# Altium PCB Luciferin_Module_V2.0_final.pcbdoc
Units mil, origin at the board's own origin, x right, y up, seen from the top; angles counter-clockwise.
Board outline 2185 x 2500 mil, 2 copper layers (Top Layer, Bottom Layer); 25 components, 44 nets, 58 pads, 34 vias.
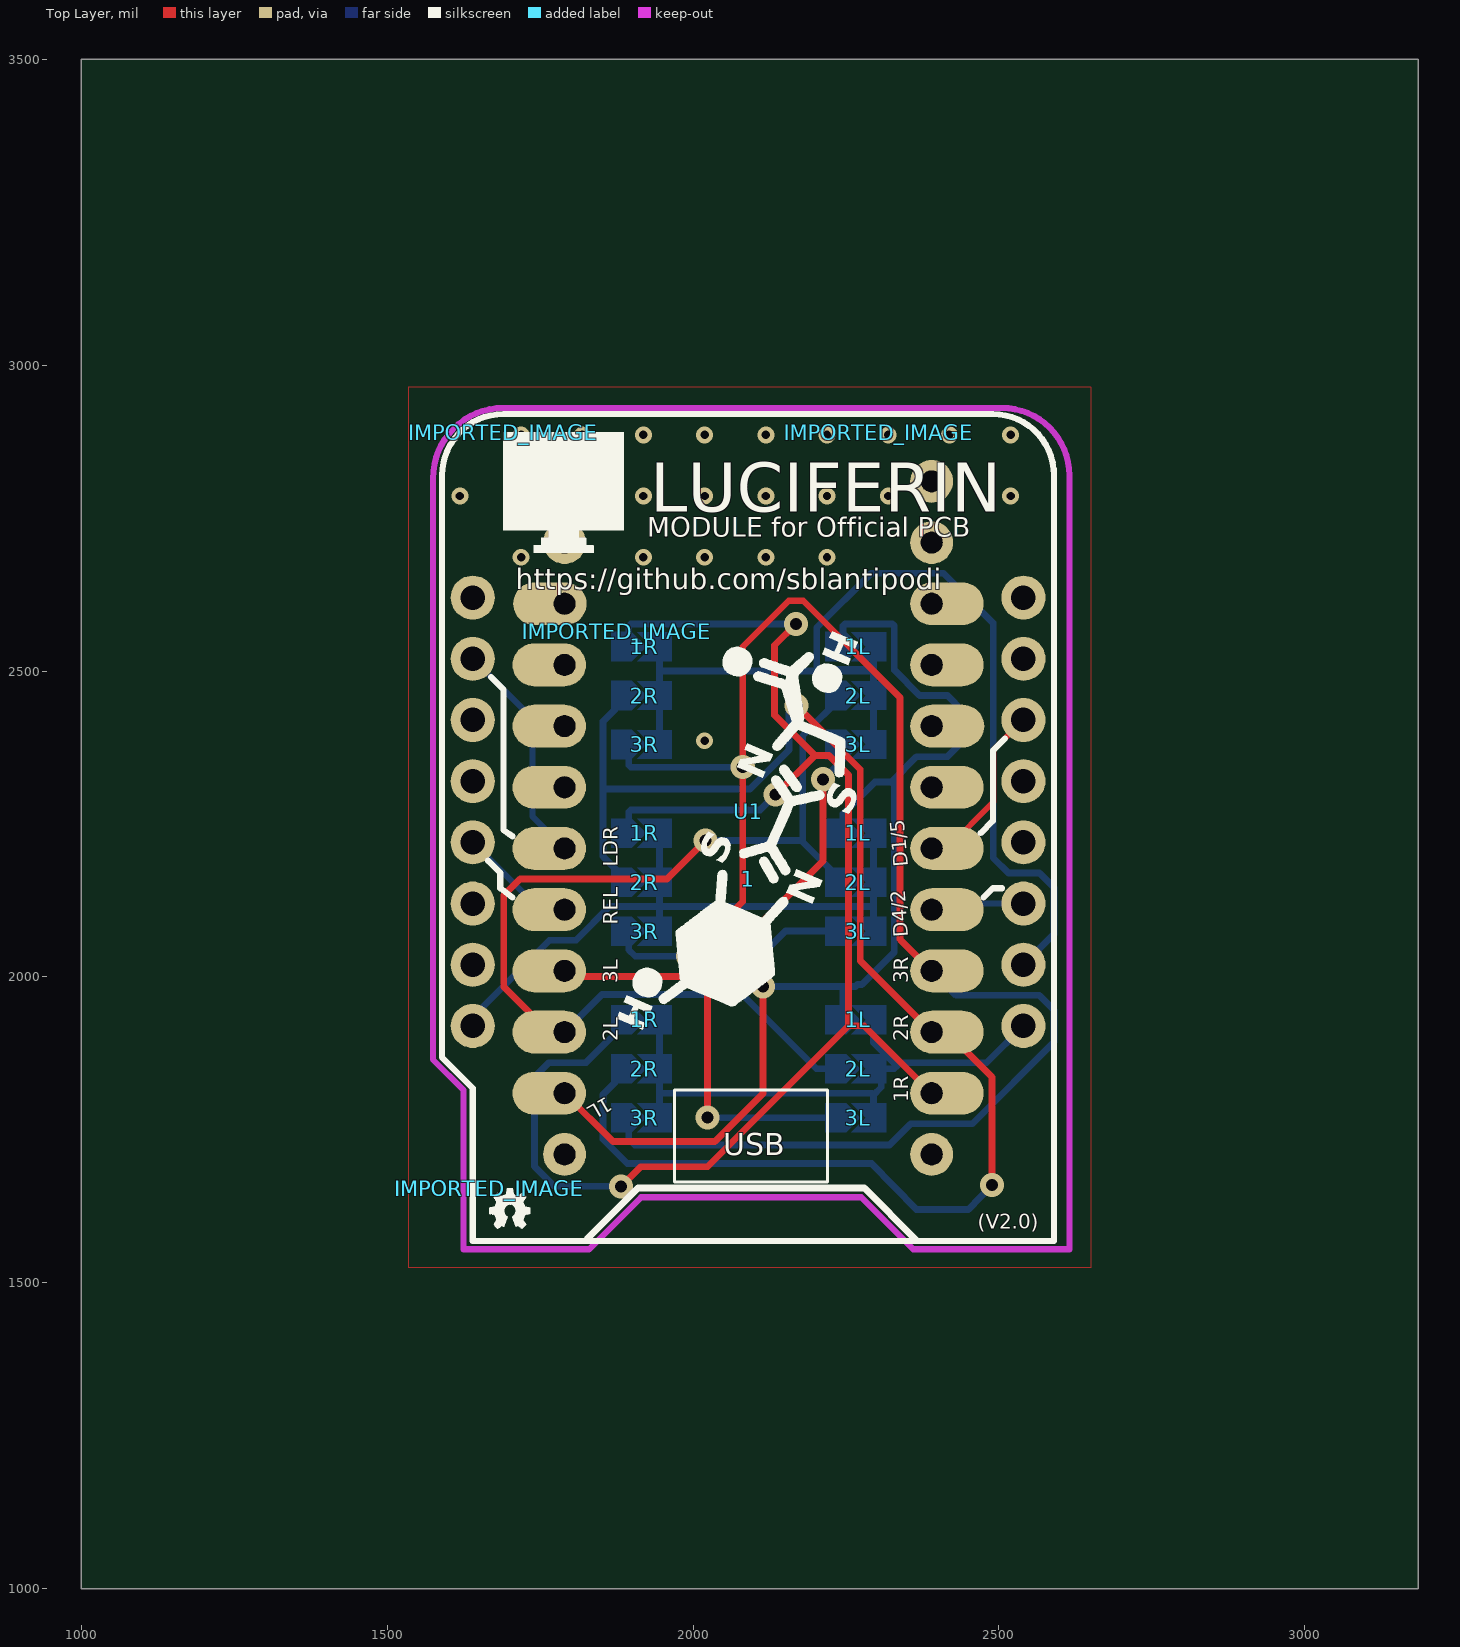
[diagram p0: Top Layer view]
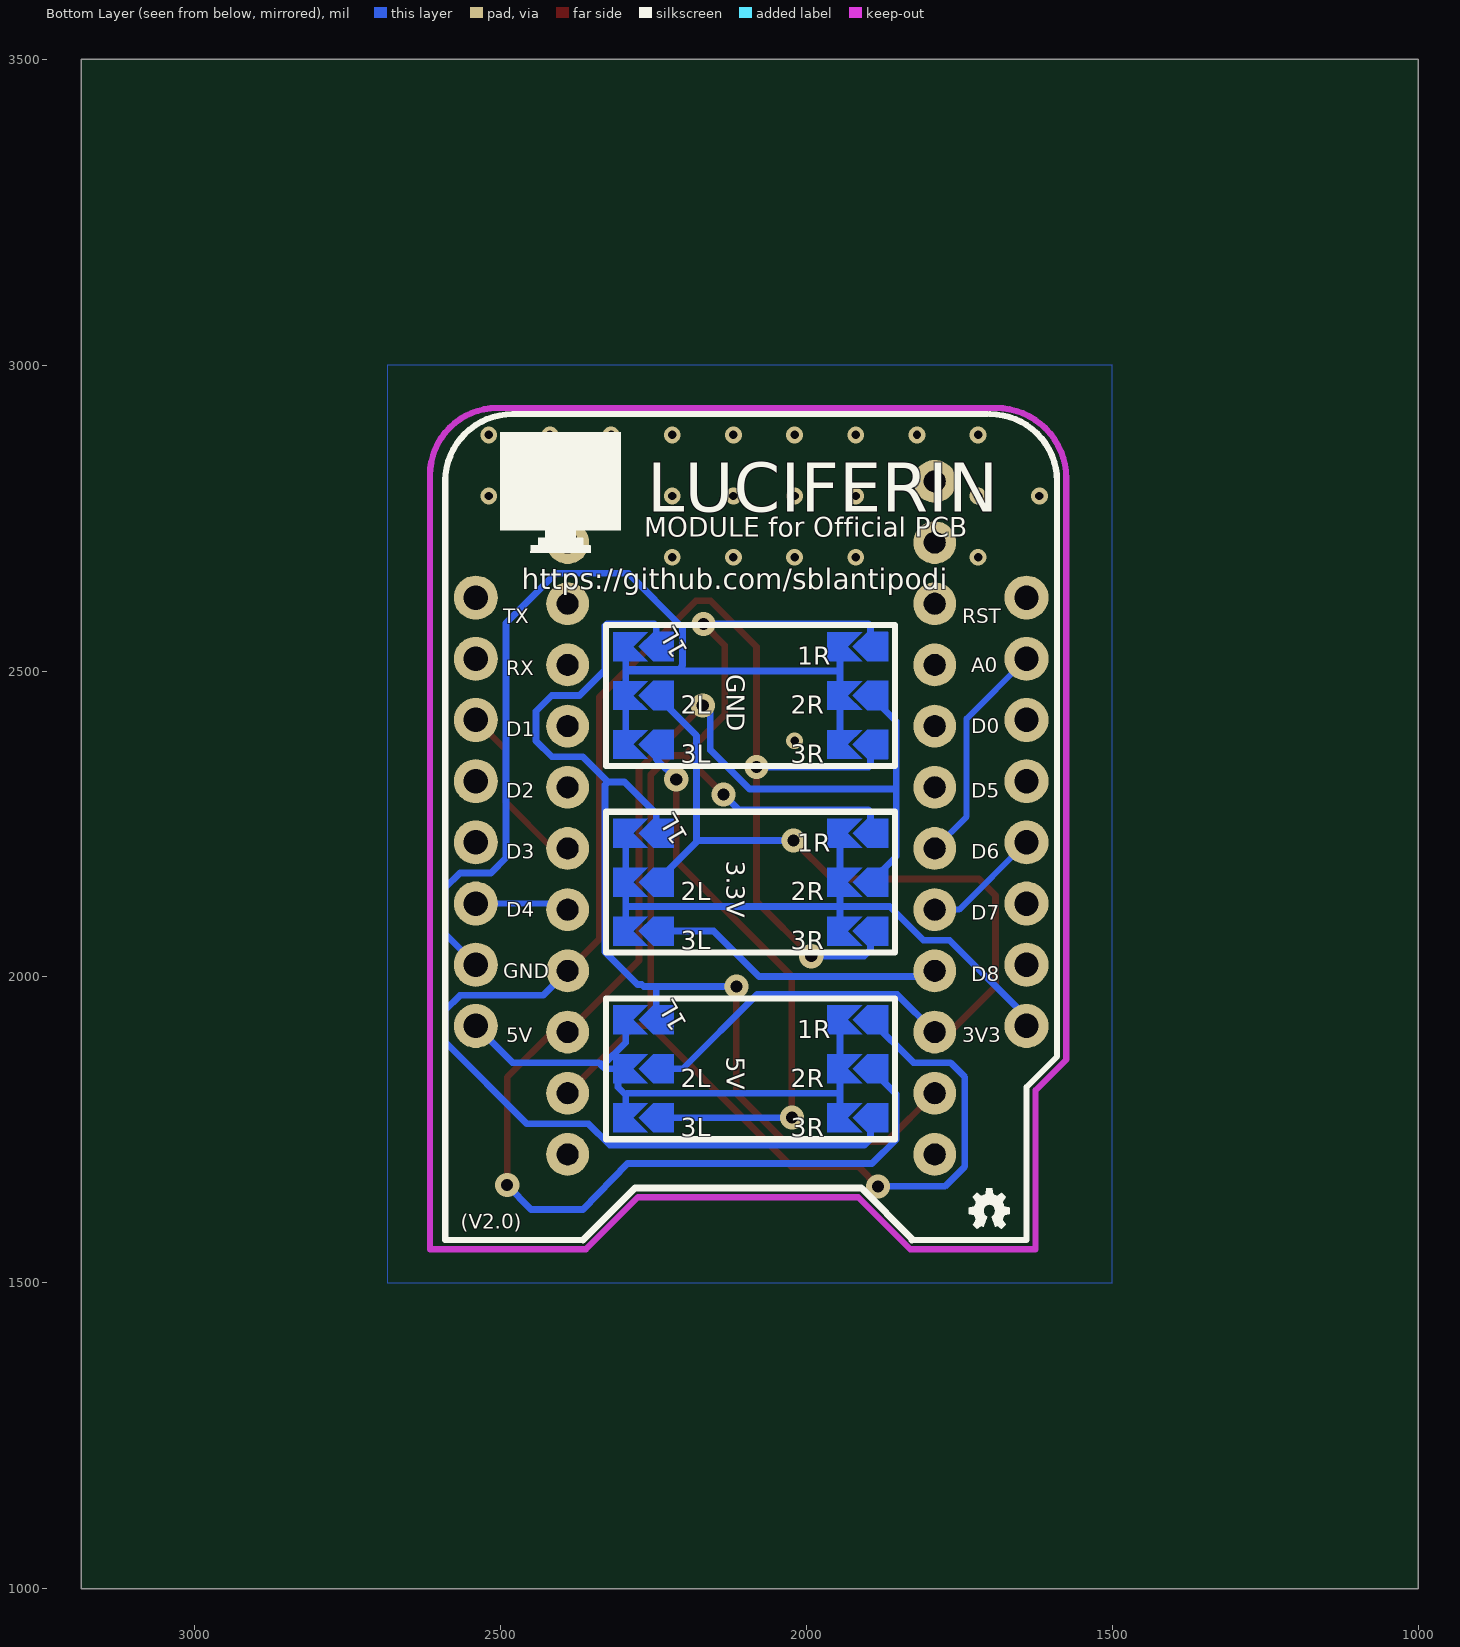
[diagram p1: Bottom Layer view, seen from below]

## Layer stack, top to bottom
Top Layer: signal copper (thickness not stored)
Dielectric: dielectric 12.6, FR-4, Dk 4.8
Bottom Layer: signal copper (thickness not stored)

## Board outline
3185,1000 1000,1000 1000,3500 3185,3500

## Components (designator, comment, footprint, x,y, rotation, side; value= is the part's Value field where it differs from the comment)
1 "SBLANT_TINYPICO_V3" TINYPICOV3 2090,2235 r90 top
1L "Solder_joint" SB_SOLDER_JOINT 2270,2235 r0 top
1L "Solder_joint" SB_SOLDER_JOINT 2270,1930 r0 top
1L "Solder_joint" SB_SOLDER_JOINT 2270,2540 r0 top
1R "Solder_joint" SB_SOLDER_JOINT 1920,2235 r0 top
1R "Solder_joint" SB_SOLDER_JOINT 1920,1930 r0 top
1R "Solder_joint" SB_SOLDER_JOINT 1920,2540 r0 top
2L "Solder_joint" SB_SOLDER_JOINT 2270,2155 r0 top
2L "Solder_joint" SB_SOLDER_JOINT 2270,1850 r0 top
2L "Solder_joint" SB_SOLDER_JOINT 2270,2460 r0 top
2R "Solder_joint" SB_SOLDER_JOINT 1920,2155 r0 top
2R "Solder_joint" SB_SOLDER_JOINT 1920,1850 r0 top
2R "Solder_joint" SB_SOLDER_JOINT 1920,2460 r0 top
3L "Solder_joint" SB_SOLDER_JOINT 2270,2075 r0 top
3L "Solder_joint" SB_SOLDER_JOINT 2270,1770 r0 top
3L "Solder_joint" SB_SOLDER_JOINT 2270,2380 r0 top
3R "Solder_joint" SB_SOLDER_JOINT 1920,2075 r0 top
3R "Solder_joint" SB_SOLDER_JOINT 1920,1770 r0 top
3R "Solder_joint" SB_SOLDER_JOINT 1920,2380 r0 top
IMPORTED_IMAGE "IMPORTED_IMAGE" IMPORTED_IMAGE 2303.15,2889.96 r0 top
IMPORTED_IMAGE "IMPORTED_IMAGE" IMPORTED_IMAGE 1667.22,1655.04 r0 top
IMPORTED_IMAGE "IMPORTED_IMAGE" IMPORTED_IMAGE 1667.22,1655.04 r0 top
IMPORTED_IMAGE "IMPORTED_IMAGE" IMPORTED_IMAGE 1690,2889.96 r0 top
IMPORTED_IMAGE "IMPORTED_IMAGE" IMPORTED_IMAGE 1875.5,2565.39 r0 top
U1 "LOLIN D1 MINI" WEMOS_D1_MINI_V2.3.0 2090,2270 r0 top

## Footprints (in the part's own frame and the unit in brackets; to place one, negate y for a bottom-side part, rotate by r counter-clockwise, add the part's x,y. Pads: shape width x height; smd on the part's side, far side on the other; paste and mask are expansions set on the pad)
IMPORTED_IMAGE [mil]
SB_SOLDER_JOINT [mil]
  Bottom Layer region: -19.94,-23.76 -20.08,-23.82 -53.54,-23.82 -53.68,-23.76 -53.74,-23.62 -53.74,23.62 -53.68,23.76 -53.54,23.82 -20.08,23.82 -19.94,23.76 3.68,0.14 3.74,0 3.68,-0.14
  Bottom Layer region: 45.51,-23.62 45.51,23.62 45.51,23.62 -11.26,23.62 -11.26,23.62 12.36,0 12.36,0 -11.26,-23.62 -11.26,-23.62
TINYPICOV3 [mil]
  round 70 hole 35.44 slot 35.45 at 0 deg paste+0 mask+2: 3V3(-225,300) 4(-125,300) 5(-225,-300) 5V(-325,300) 14(-25,300) 15(75,300) 18(-325,-300) 19(-425,-300) 21(-25,-300) 22(-125,-300) 23(-525,-300) 25(375,300) 26(275,300) 27(175,300) 32(75,-300) 33(175,-300) BAT(-525,300) GND1(-425,300) GND2(375,-300) RST(275,-300)
  oval 70x120 smd paste+0 mask+2: 3V3(-225,325) 4(-125,325) 5(-225,-325) 5V(-325,325) 14(-25,325) 15(75,325) 18(-325,-325) 19(-425,-325) 21(-25,-325) 22(-125,-325) 25(375,324) 26(275,325) 27(175,325) 32(75,-325) 33(175,-326) GND1(-425,325) GND2(375,-325) RST(275,-325)
  silkscreen extent -570,-130 -420,120
WEMOS_D1_MINI_V2.3.0 [mil]
  round 72 hole 40 paste+0 mask+4: 3V3(-450,-350) 5V(450,-350) A0(-450,250) D0(-450,150) D1(450,150) D2(450,50) D3(450,-50) D4(450,-150) D5(-450,50) D6(-450,-50) D7(-450,-150) D8(-450,-250) GND(450,-250) RST(-450,350) RX(450,250) TX(450,350)
  silkscreen extent -500,-702 500,650

## Free pads (board coordinates)
  round 70 hole 35.44 slot 35.45 at 90 deg paste+0 mask+2: 25(1790,2810) 26(1790,2710) GND2(2390,2810) RST(2390,2710)

## Via types
v1: diameter 27.56, hole 13.78, Top Layer to Bottom Layer, tented both sides, 23 vias
v2: diameter 39.37, hole 19.69, Top Layer to Bottom Layer, tented both sides, 11 vias

## Nets (pads, with @x,y where several pads share a name; then routed paths per layer and width w, separated by ;. In a path a pad name is that pad's centre, name@x,y a point inside that pad or via, vN(x,y) a via of type N, cw(c..) or ccw(c..) an arc to the next point about the centre after c; other vN are vias at no path point)
1_15: 1.15 | length 25
  Top Layer w9.84: 1.15@1765,2310 1.15@1790,2310
1_23: 1.23
1_26: 1.26 | length 25
  Top Layer w9.84: 1.26@1765,2510 1.26@1790,2510
1_27: 1.27 | length 25
  Top Layer w9.84: 1.27@1765,2410 1.27@1790,2410
1_32: 1.32 | length 25
  Top Layer w9.84: 1.32@2390,2310 1.32@2415,2310
1_33: 1.33 | length 26
  Top Layer w9.84: 1.33@2390,2410 1.33@2416,2410
1_BAT: 1.BAT
1_RST: 1.RST | length 25
  Top Layer w9.84: 1.RST@2390,2510 1.RST@2415,2510
NC1: pad.25
NC2: pad.GND2
NC3: pad.26
NC4: pad.RST
NC5: 1.25 | length 24
  Top Layer w9.84: 1.25@1766,2610 1.25@1790,2610
NC6: 1.GND2 | length 25
  Top Layer w9.84: 1.GND2@2390,2610 1.GND2@2415,2610
S$6280: 
S$6288: 
S$6292: 
S$12763: 
S$13149: 
S$13153: 
S$20682: 
S$86624: 
SJ_5V_1_LEFT_1: 1.GND1 | length 1821.3
  Top Layer w11.02: 1.GND1@1765,1810 1790,1810 1869.08,1730.92 2035.57,1730.92 2114.27,1809.62 v2(2114.28,1984.37)
  Bottom Layer w11.02: v2(2114.28,1984.37) 2245,1984.37 ; 2245,1930 2245,1984.37 ; 2245,2235 2245,2266.67 2297.11,2318.78 2324.22,2318.78 ; 2245,2540 2245,2573.86 2248.21,2577.07 2325.75,2577.07 2328.96,2573.86 2328.96,2501.45 2370.41,2460 2415.9,2460 2441.68,2434.22 2441.68,2385.77 2415.91,2360 2365.45,2360 2324.23,2318.78 2328.96,2314.04 2328.96,2040.92 2275.88,1987.84 2268.98,1987.84 2265.51,1984.37 2245,1984.37
SJ_5V_2_LEFT_1: 1.5V | length 1695.1
  Top Layer w11.02: 1.5V@1790,1910 1765,1910 1690.51,1984.49 1690.51,2132.99 1717.52,2160 1957.45,2160 v2(2020.62,2223.17)
  Bottom Layer w11.02: 1.5V@1790,1910 1851.41,1971.41 2080.4,1971.41 2201.81,1850 2245,1850 ; v2(2020.62,2223.17) 2179.32,2223.17 ; 2245,2155 2179.32,2220.68 2179.32,2223.17 ; 2245,2460 2179.32,2394.32 2179.32,2223.17
SJ_5V_3_LEFT_1: 1.3V3 | length 1675.1
  Top Layer w11.02: 1.3V3@1765,2010 1790,2010 1799.23,2000.77 2023.56,2000.77 ; v2(2023.56,1770) 2023.56,2000.77 ; v2(2212.45,2323.1) 2212.45,2189.66 2023.56,2000.77
  Bottom Layer w11.02: 1.3V3@1790,2010 1799.23,2000.77 2077,2000.77 2151.23,2075 2245,2075 ; v2(2023.56,1770) 2245,1770 ; v2(2212.45,2323.1) 2245,2355.65 2245,2380
SJ_GND_1_RIGHT_1: 1.19 | length 2601.5
  Top Layer w11.02: v2(1882.54,1657.77) 1914.7,1690 2024,1690 2254.3,1920.3 ; v2(2135.02,2297.98) 2199.14,2362.1 ; v2(2168.22,2577.06) 2133.32,2542.16 2133.32,2427.92 2199.14,2362.1 ; 1.19@2415,1810 2390,1810 2279.67,1920.33 2254.26,1920.33 2254.26,2330.15 2222.31,2362.1 2199.14,2362.1
  Bottom Layer w11.02: v2(1882.54,1657.77) 1773.42,1657.77 1740.74,1690.45 1740.74,1836.26 1764.44,1859.96 1824.96,1859.96 1895,1930 ; 1895,2235 1895,2269.53 1898.21,2272.74 2109.78,2272.74 v2(2135.02,2297.98) ; 1895,2540 1895,2573.86 1898.2,2577.06 v2(2168.22,2577.06)
SJ_GND_2_RIGHT_1: 1.18 | length 2512.5
  Top Layer w11.02: v2(2169.09,2443.62) 2273.22,2339.49 2273.22,2026.78 2390,1910 2415,1910 2488.71,1836.29 v2(2488.71,1659.67)
  Bottom Layer w11.02: 1895,1850 1852.8,1807.8 1852.8,1734.7 1892.5,1695 2292,1695 2365,1620 2450,1620 v2(2488.71,1659.67) ; 1895,2155 1852.82,2197.18 1852.82,2307.25 ; 1895,2460 1852.82,2417.82 1852.82,2307.25 ; v2(2169.09,2443.62) 2156.74,2431.27 2156.74,2371.09 2092.9,2307.25 1852.82,2307.25
SJ_GND_3_RIGHT_1: 1.5 | length 2825.3
  Top Layer w11.02: v2(1991.78,2033.9) 2081.23,2123.35 v2(2081.23,2342.94) 2081.23,2539.69 2156.45,2614.91 2180.1,2614.91 2338.45,2456.56 2338.45,2061.55 2390,2010 1.5@2415,2010
  Bottom Layer w11.02: 1895,1770 1895,1735.1 1904.8,1725.4 2321.1,1725.4 2355.7,1760 2456.4,1760 2590,1893.6 2590,1945.9 2566,1970 2430,1970 1.5@2390,2010 ; 1895,2075 1895,2044.39 1905.49,2033.9 v2(1991.78,2033.9) ; 1895,2380 1895,2346.14 1898.2,2342.94 v2(2081.23,2342.94)
U1_3V3: U1.3V3 | length 1064.2
  Bottom Layer w11.02: U1.3V3 1640,1934.44 1765.56,2060 1808.53,2060 1863.53,2115 1945,2115 ; 1945,2075 1945,2115 ; 1945,2235 1945,2155 1945,2115 ; 2295,2075 2295,2115 ; 2295,2235 2295,2155 2295,2115 ; 1945,2115 2295,2115
U1_5V: U1.5V | length 961.9
  Bottom Layer w11.02: 1945,1770 1945,1810 ; 1945,1930 1945,1850 1945,1810 ; 2295,1770 2295,1807.02 ; 2295,1850 2307.67,1850 ; 2295,1930 2295,1892.98 2333.45,1854.54 ; U1.5V 2480,1860 2338.91,1860 2333.45,1854.54 ; 1945,1810 2292.02,1810 2295,1807.02 ; 2295,1807.02 2307.67,1819.69 2307.67,1850 ; 2307.67,1850 2328.91,1850 2333.45,1854.54
U1_A0: 1.14 U1.A0 | length 397.1
  Top Layer w9.84: 1.14@1765,2210 1.14@1790,2210
  Bottom Layer w9.84: U1.A0 1737.86,2422.14 1737.86,2262.14 1.14@1790,2210
U1_D0: U1.D0
U1_D1: 1.21 U1.D1 | length 286.8
  Top Layer w9.84: 1.21@2390,2210 2415,2210 2491.14,2286.14 2491.14,2371.14 U1.D1
U1_D2: U1.D2
U1_D3: U1.D3
U1_D4: 1.22 U1.D4 | length 179.1
  Top Layer w9.84: 1.22@2390,2110 1.22@2415,2110
  Bottom Layer w9.84: 1.22@2390,2110 2400,2120 U1.D4
U1_D5: U1.D5
U1_D6: 1.4 U1.D6 | length 220.6
  Top Layer w9.84: 1.4@1765,2110 1.4@1790,2110
  Bottom Layer w9.84: U1.D6 1750,2110 1.4@1790,2110
U1_D7: U1.D7
U1_D8: U1.D8
U1_GND: U1.GND | length 1836.4
  Bottom Layer w11.02: 1945,2380 1945,2460 1945,2500 ; 1945,2540 1945,2500 ; 2295,2380 2295,2460 2295,2500 ; 2295,2540 2295,2502.73 ; U1.GND 2590,2070 2590,2145.99 2565.99,2170 2515.39,2170 2490.56,2194.83 2490.56,2578.35 2408.91,2660 2291.38,2660 2202.11,2570.73 2202.11,2508.91 2208.29,2502.73 2295,2502.73 ; 1945,2500 2295,2500 ; 2295,2500 2295,2502.73
  other v1: 2018.98,2386.02 1718.98,2686.02 1918.98,2686.02 2018.98,2686.02 2118.98,2686.02 2218.98,2686.02 1618.98,2786.02 1718.98,2786.02 1918.98,2786.02 2018.98,2786.02 2118.98,2786.02 2218.98,2786.02 2318.98,2786.02 2518.98,2786.02 1718.98,2886.02 1818.98,2886.02 1918.98,2886.02 2018.98,2886.02 2118.98,2886.02 2218.98,2886.02 2318.98,2886.02 2418.98,2886.02 2518.98,2886.02
U1_RST: U1.RST
U1_RX: U1.RX
U1_TX: U1.TX

## Polygon pours and split planes (outlines as drawn)
U1_GND on Bottom Layer (solid): 1500,3000 2685,3000 2685,1500 1500,1500
U1_GND on Top Layer (solid): 1535,2965 2650,2965 2650,1525 1535,1525

## Keep-outs
Keep-Out Layer:
  lines w10 net S$12763: 1575,2815 cw(c1690,2815) 1690,2930 ; 2505,2930 cw(c2505,2820) 2615,2820

## Silkscreen, mask and mechanical layers (free items; w line width, h text height)
Top Overlay:
  lines w10 net S$13149: 2470,2235 2490,2255 2490,2370 2510,2390
  lines w10 net S$13153: 2475,2130 2490,2145 2505,2145
  lines w10 net U1_A0: 1670,2490 1690,2470 1690,2240 1705,2230
  lines w10 net U1_D6: 1665,2190 1685,2170 1685,2145 1705,2130
  lines w11.02 net S$86624: 1827.7,1570 1827.7,1572.7 1910,1655 2280,1655 2364.7,1570
  text "LUCIFERIN" at 1930,2760 h80
  text "MODULE for Official PCB" at 1925,2719.25 h31.5
  text "https://github.com/sblantipodi" at 1710,2633.27 h33.47
  text "D1/5" at 2351.77,2181.03 h23.62 r95
  text "LDR" at 1876.81,2180 h23.62 r90
  text "REL" at 1876.81,2085 h23.62 r90
  text "D4/2" at 2351.78,2065.82 h23.62 r94
  text "3L" at 1876.81,1990 h23.62 r90
  text "3R" at 2351.81,1990 h23.62 r90
  text "2L" at 1876.81,1895 h23.62 r90
  text "2R" at 2351.81,1895 h23.62 r90
  text "1L" at 1859.09,1805.23 h23.62 r210
  text "1R" at 2351.81,1795 h23.62 r90
  text "(V2.0)" at 2465,1588.19 h23.62
Bottom Overlay:
  lines w10: 1855,1734.68 2327.44,1734.68 2327.44,1965 1855,1965 1855,1734.68 ; 1855,2039.68 2327.44,2039.68 2327.44,2270 1855,2270 1855,2039.68 ; 1855,2344.68 2327.44,2344.68 2327.44,2575 1855,2575 1855,2344.68
  lines w10 net S$12763: 1590,2810 cw(c1700,2810) 1700,2920 ; 1590,2820 1590,1870 1640,1820 1640,1570 1825,1570 ; 1705,2920 2460,2920 ; 2365,1570 2590,1570 2590,2815 ; 2440,2920 2480,2920 cw(c2480,2810) 2590,2810
  lines w11.02 net S$86624: 1827.7,1570 1827.7,1572.7 1910,1655 2280,1655 2364.7,1570
  text "LUCIFERIN" at 2260,2760 h80
  text "MODULE for Official PCB" at 2265,2719.25 h31.5
  text "https://github.com/sblantipodi" at 2465,2633.27 h33.47
  text "GND" at 2130,2495 h30 r90
  text "3.3V" at 2130,2190 h30 r90
  text "5V" at 2130,1870 h30 r90
  text "(V2.0)" at 2565,1588.19 h23.62
Document:
  lines w0.1: 2092.49,2249.99 2092.51,2250.01

## Text inside footprints (layer, text, board x,y; h text height)
1: Top Overlay "USB" at 2049.5,1708.5 h36
U1: Bottom Overlay "D8" at 1730,1993.19 h23.62; Bottom Overlay "D7" at 1730,2093.19 h23.62; Bottom Overlay "D6" at 1730,2193.19 h23.62; Bottom Overlay "D5" at 1730,2293.19 h23.62; Bottom Overlay "D0" at 1730,2398.19 h23.62; Bottom Overlay "A0" at 1730,2498.19 h23.62; Bottom Overlay "RST" at 1745,2578.19 h23.62; Bottom Overlay "3V3" at 1745,1893.19 h23.62; Bottom Overlay "5V" at 2490,1893.19 h23.62; Bottom Overlay "GND" at 2495,1998.19 h23.62; Bottom Overlay "D4" at 2490,2098.19 h23.62; Bottom Overlay "D3" at 2490,2193.19 h23.62; Bottom Overlay "D2" at 2490,2293.19 h23.62; Bottom Overlay "D1" at 2490,2393.19 h23.62; Bottom Overlay "RX" at 2490,2493.19 h23.62; Bottom Overlay "TX" at 2495,2578.19 h23.62